# Altium PCB evacc_v3_1.PcbDoc (part 3 of 5)
Units mm, origin at the board's own origin, x right, y up, seen from the top; angles counter-clockwise.
Board outline 160 x 215 mm, 2 copper layers (Top Layer, Bottom Layer), stack 1.671 mm thick; 227 components, 143 nets, 622 pads, 320 vias.
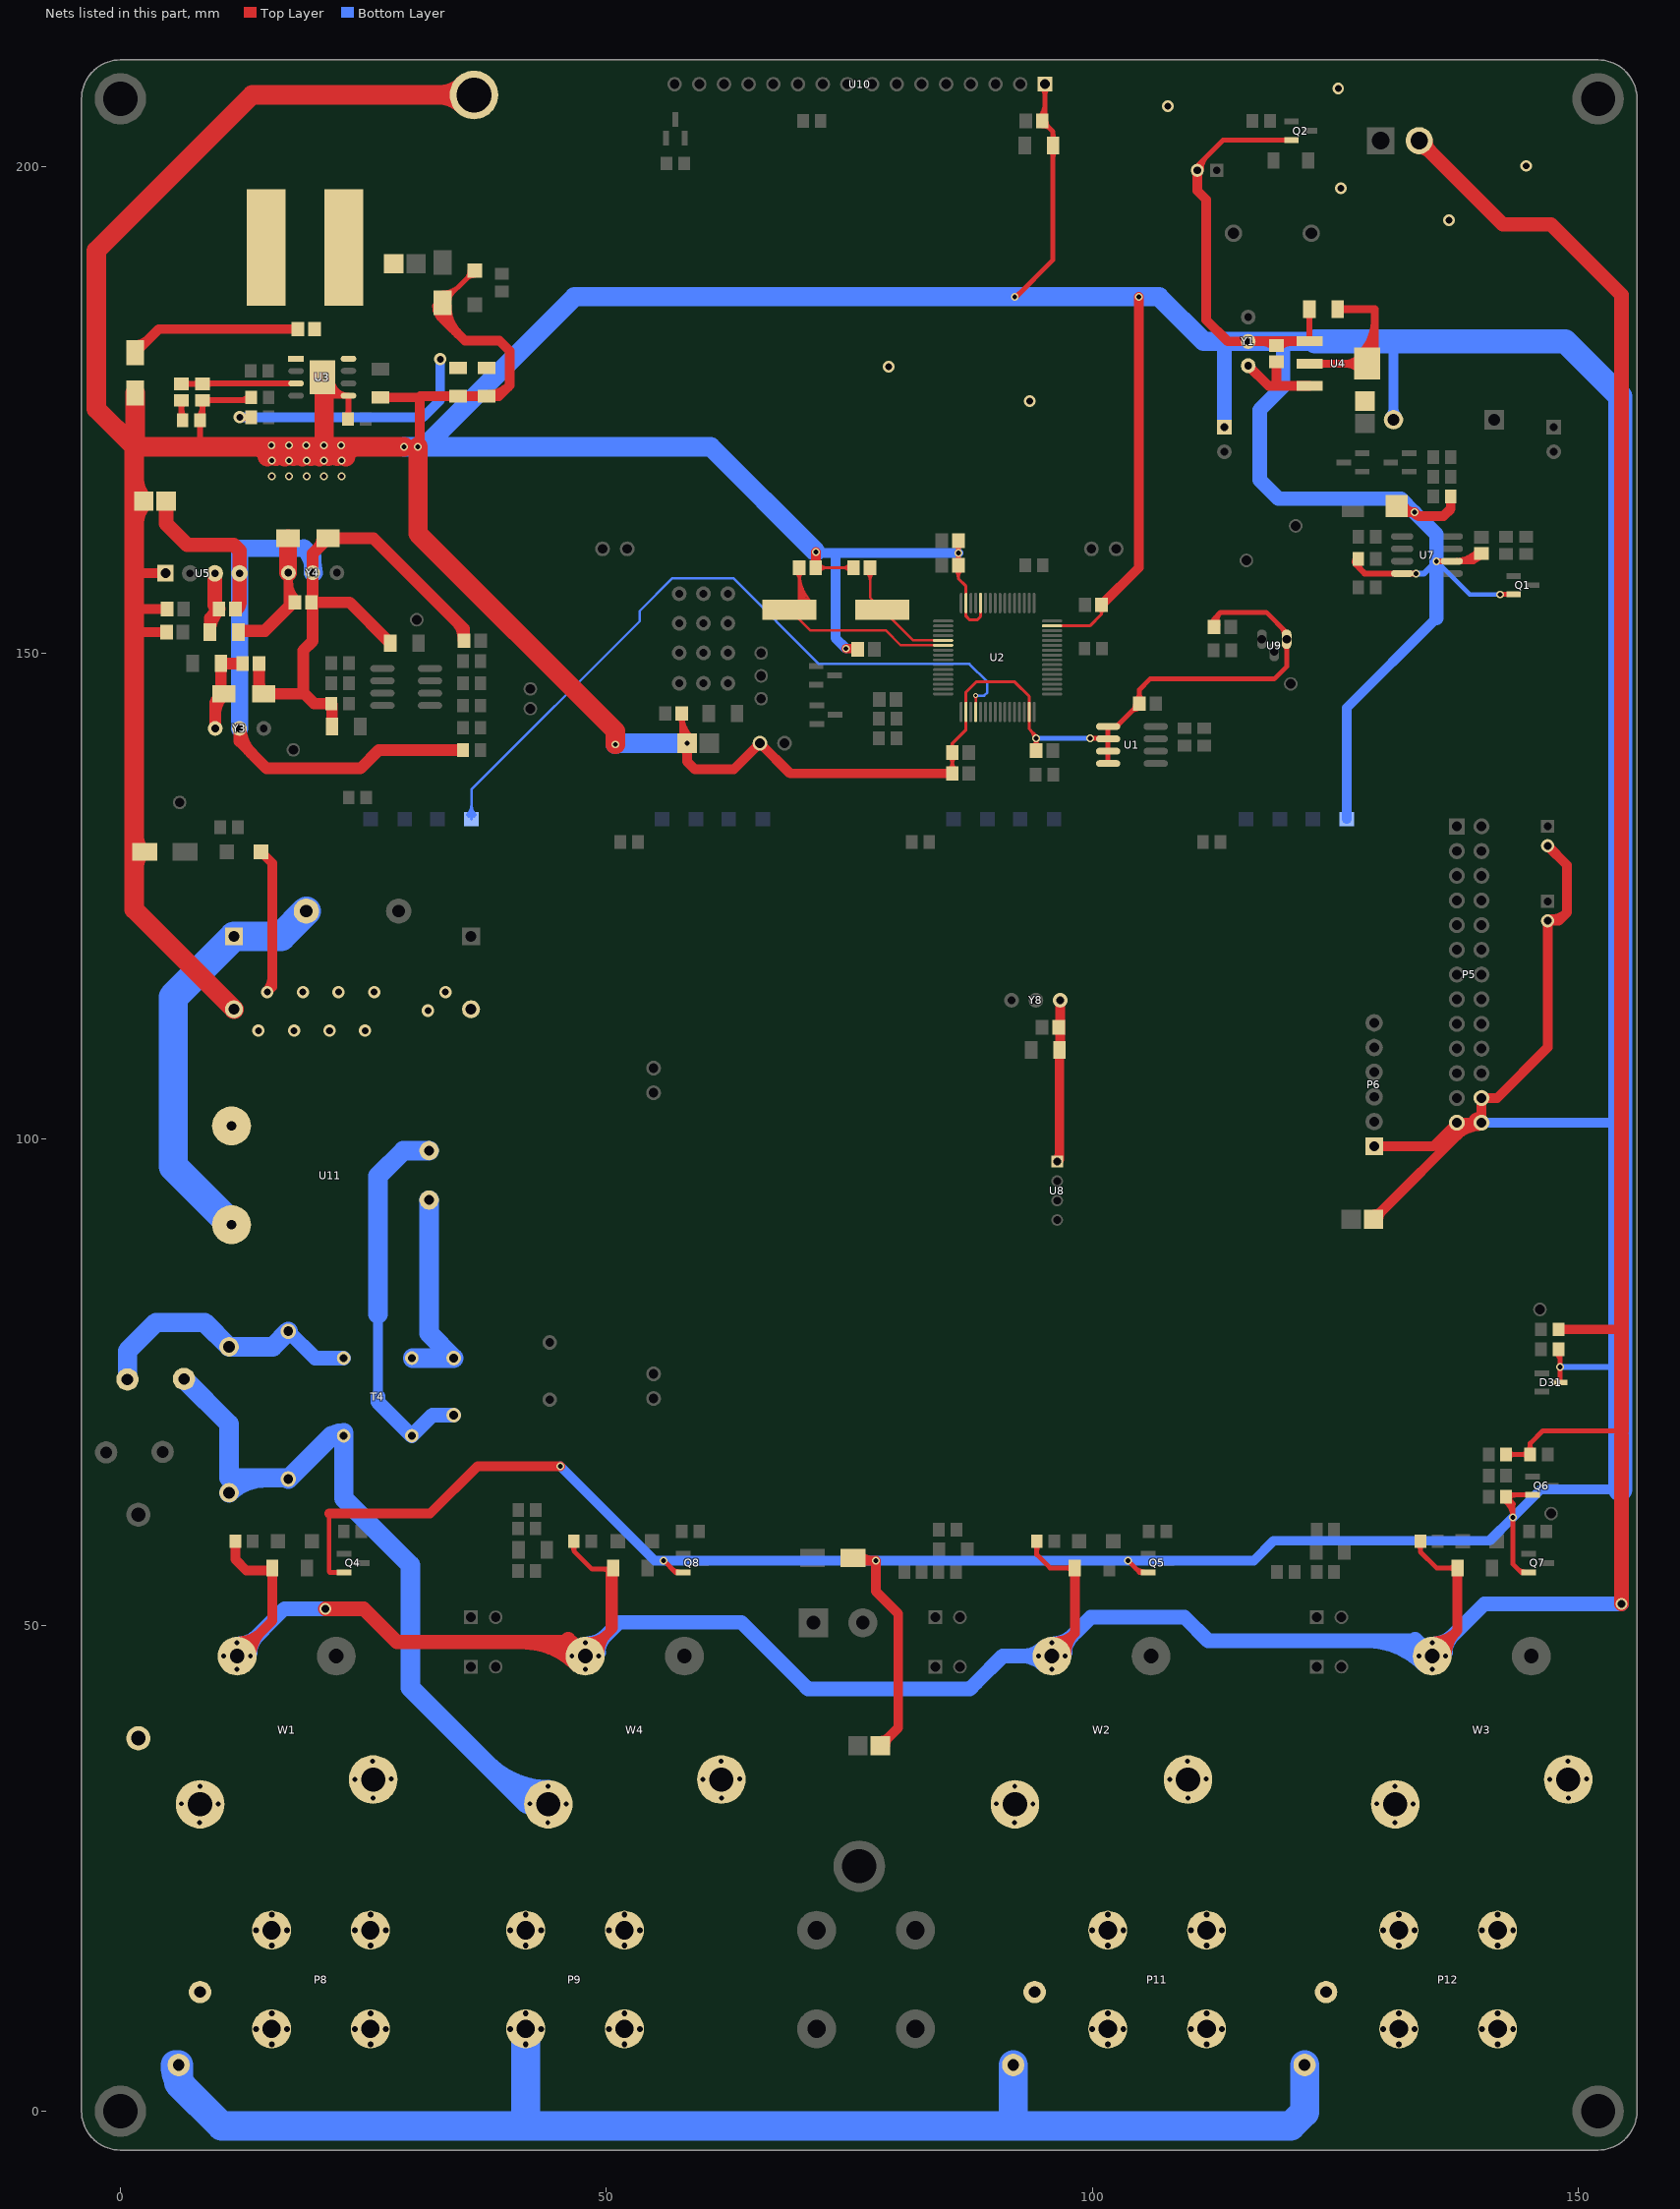
[diagram p3: the nets of this part, all layers, seen from the top]

## Via types
v1: diameter 0.8, hole 0.5, Top Layer to Bottom Layer, 150 vias
v2: diameter 0.8, hole 0.6, Top Layer to Bottom Layer, 80 vias
v3: diameter 0.5, hole 0.3, Top Layer to Bottom Layer, 53 vias
v4: diameter 1.27, hole 0.711, Top Layer to Bottom Layer, 20 vias
v5: diameter 1.2, hole 0.7, Top Layer to Bottom Layer, 13 vias
v6: diameter 1.2, hole 0.8, Top Layer to Bottom Layer, 4 vias

## Nets (pads, with @x,y where several pads share a name; then routed paths per layer and width w, separated by ;. In a path a pad name is that pad's centre, name@x,y a point inside that pad or via, vN(x,y) a via of type N, cw(c..) or ccw(c..) an arc to the next point about the centre after c; other vN are vias at no path point) (continued)
EM12V: D23.2 D24.2 D27.2 D28.2 P7.2 R47.2 R48.2 R49.2 R53.1 R54.2 R57.2 R58.2 W1.1 W2.1 W3.1 W4.1 | length 931.3
  Top Layer w0.254: v1(10.627,46.814) W1.1@12.002,46.814 v1(12.002,45.439) ; R47.2@11.819,58.371 R47.2@11.819,58.625 ; D23.2@15.624,55.626 D23.2@15.624,55.88 ; v1(47.816,45.439) W4.1@47.816,46.814 v1(47.816,48.189) ; 50.041,49.039 50.041,55.753 ; D28.2@50.676,55.753 D28.2@50.676,55.88 ; v1(95.822,45.439) W2.1@95.822,46.814 v1(95.822,48.189) ; v1(134.938,45.439) W3.1@134.938,46.814 v1(134.938,48.189) ; 154.394,69.977 154.394,80.442 154.394,162.14 ; 154.432,69.487 154.922,69.977 ; W1.1@11.286,46.814 cw(c11.286,47.473) 10.82,47.007 ccw(c11.286,47.473) W1.1@11.286,46.814 ; W1.1@11.286,46.814 ccw(c11.286,46.155) 10.82,46.621 cw(c11.286,46.155) W1.1@11.286,46.814 ; W1.1@12.002,46.098 cw(c11.343,46.098) 11.809,45.632 ccw(c11.343,46.098) W1.1@12.002,46.098 ; W1.1@12.002,46.098 ccw(c12.661,46.098) 12.195,45.632 cw(c12.661,46.098) W1.1@12.002,46.098 ; W4.1@47.816,46.098 cw(c47.157,46.098) 47.623,45.632 ccw(c47.157,46.098) W4.1@47.816,46.098 ; W4.1@47.816,46.098 ccw(c48.475,46.098) 48.009,45.632 cw(c48.475,46.098) W4.1@47.816,46.098 ; W4.1@47.816,47.529 cw(c48.475,47.529) 48.009,47.996 ccw(c48.475,47.529) W4.1@47.816,47.529 ; W4.1@47.816,47.529 ccw(c47.157,47.529) 47.623,47.996 cw(c47.157,47.529) W4.1@47.816,47.529 ; W2.1@95.822,46.098 cw(c95.163,46.098) 95.629,45.632 ccw(c95.163,46.098) W2.1@95.822,46.098 ; W2.1@95.822,46.098 ccw(c96.481,46.098) 96.015,45.632 cw(c96.481,46.098) W2.1@95.822,46.098 ; W2.1@95.822,47.529 cw(c96.481,47.529) 96.015,47.996 ccw(c96.481,47.529) W2.1@95.822,47.529 ; W2.1@95.822,47.529 ccw(c95.163,47.529) 95.629,47.996 cw(c95.163,47.529) W2.1@95.822,47.529 ; W3.1@134.938,46.098 cw(c134.279,46.098) 134.745,45.632 ccw(c134.279,46.098) W3.1@134.938,46.098 ; W3.1@134.938,46.098 ccw(c135.597,46.098) 135.131,45.632 cw(c135.597,46.098) W3.1@134.938,46.098 ; W3.1@134.938,47.529 cw(c135.597,47.529) 135.131,47.996 ccw(c135.597,47.529) W3.1@134.938,47.529 ; W3.1@134.938,47.529 ccw(c134.279,47.529) 134.745,47.996 cw(c134.279,47.529) W3.1@134.938,47.529 ; 50.041,52.92 cw(c53.411,52.92) 51.028,55.303 ccw(c53.411,52.92) 50.041,52.92 ; 50.041,53.533 cw(c52.798,53.533) 50.849,55.482 ccw(c52.798,53.533) 50.041,53.533 ; 50.041,54.146 cw(c52.185,54.146) 50.669,55.662 ccw(c52.185,54.146) 50.041,54.146 ; 50.041,54.759 cw(c51.572,54.759) 50.489,55.842 ccw(c51.572,54.759) 50.041,54.759 ; 50.041,55.373 cw(c50.958,55.373) 50.31,56.021 ccw(c50.958,55.373) 50.041,55.373
  Top Layer w0.5: R58.2@46.642,58.625 46.642,57.625 48.514,55.753 50.041,55.753 ; R49.2@94.267,58.625 94.267,57.244 95.631,55.88 D24.2@98.174,55.88 ; R57.2@133.72,58.625 133.72,57.542 135.382,55.88 D27.2@137.544,55.88 ; R54.2@142.549,67.564 R53.1@145.023,67.564 145.023,68.696 146.304,69.977 154.394,69.977 154.432,69.977 154.922,69.977 ; 46.642,57.68 cw(c47.487,57.68) 46.89,58.277 ccw(c47.487,57.68) 46.642,57.68 ; 46.642,57.68 ccw(c45.797,57.68) 46.395,58.277 cw(c45.797,57.68) 46.642,57.68 ; 50.041,55.753 cw(c50.041,55.465) 50.317,55.548 ccw(c50.041,55.465) 50.041,55.753 ; 50.041,55.753 ccw(c50.041,56.244) 50.401,55.91 cw(c50.041,56.244) 50.041,55.753 ; 94.267,57.68 cw(c95.112,57.68) 94.515,58.277 ccw(c95.112,57.68) 94.267,57.68 ; 94.267,57.68 ccw(c93.422,57.68) 94.02,58.277 cw(c93.422,57.68) 94.267,57.68 ; 97.269,55.88 cw(c97.269,54.975) 97.909,55.615 ccw(c97.269,54.975) 97.269,55.88 ; 97.269,55.88 ccw(c97.269,56.785) 97.909,56.145 cw(c97.269,56.785) 97.269,55.88 ; 133.72,57.68 cw(c134.565,57.68) 133.967,58.277 ccw(c134.565,57.68) 133.72,57.68 ; 133.72,57.68 ccw(c132.875,57.68) 133.472,58.277 cw(c132.875,57.68) 133.72,57.68 ; 136.639,55.88 cw(c136.639,54.975) 137.279,55.615 ccw(c136.639,54.975) 136.639,55.88 ; 136.639,55.88 ccw(c136.639,56.785) 137.279,56.145 cw(c136.639,56.785) 136.639,55.88 ; 143.394,67.564 cw(c143.394,68.409) 142.797,67.811 ccw(c143.394,68.409) 143.394,67.564 ; 143.394,67.564 ccw(c143.394,66.719) 142.797,67.317 cw(c143.394,66.719) 143.394,67.564 ; 144.178,67.564 cw(c144.178,66.719) 144.776,67.317 ccw(c144.178,66.719) 144.178,67.564 ; 144.178,67.564 ccw(c144.178,68.409) 144.776,67.811 cw(c144.178,68.409) 144.178,67.564 ; 145.023,68.509 cw(c144.178,68.509) 144.776,67.911 ccw(c144.178,68.509) 145.023,68.509 ; 145.023,68.509 ccw(c145.868,68.509) 145.271,67.911 cw(c145.868,68.509) 145.023,68.509 ; 49.534,55.753 cw(c49.534,54.513) 50.411,55.39 ccw(c49.534,54.513) 49.534,55.753 ; 50.007,55.753 ccw(c50.007,56.324) 50.411,55.92 cw(c50.007,56.324) 50.007,55.753
  Top Layer w1: R47.2@11.819,58.371 11.819,56.761 12.954,55.626 15.624,55.626 15.624,50.436 W1.1@12.002,46.814 v1(12.002,48.189) ; W4.1@47.816,46.814 50.041,49.039 ; D28.2@50.676,55.753 50.676,49.674 50.041,49.039 ; W2.1@95.822,46.814 98.174,49.166 ; D24.2@98.174,55.88 98.174,49.166 ; W3.1@134.938,46.814 137.544,49.42 D27.2@137.544,55.88 ; R48.2@147.941,80.416 154.369,80.416 ; 14.563,49.375 cw(c12.002,51.935) 12.002,48.314 ccw(c12.002,51.935) 14.563,49.375 ; 14.563,49.375 ccw(c17.123,46.814) 13.502,46.814 cw(c17.123,46.814) 14.563,49.375 ; 50.041,49.039 cw(c48.238,50.842) 47.972,48.306 ccw(c48.238,50.842) 50.041,49.039 ; 50.041,49.039 ccw(c51.844,47.236) 49.308,46.97 cw(c51.844,47.236) 50.041,49.039 ; 98.174,49.166 cw(c96.097,51.243) 95.915,48.311 ccw(c96.097,51.243) 98.174,49.166 ; 98.174,49.166 ccw(c100.251,47.089) 97.319,46.907 cw(c100.251,47.089) 98.174,49.166 ; 137.499,49.375 cw(c134.938,51.935) 134.938,48.314 ccw(c134.938,51.935) 137.499,49.375 ; 137.499,49.375 ccw(c140.059,46.814) 136.438,46.814 cw(c140.059,46.814) 137.499,49.375
  Top Layer w1.5: v6(21.082,51.689) 25.019,51.689 28.448,48.26 46.37,48.26 W4.1@47.129,47.501 ; P7.2@133.604,202.692 142.215,194.081 147.168,194.081 154.432,186.817 154.432,69.977 ; 154.369,80.416 154.394,80.442 ; v6(154.432,52.197) 154.432,69.487 ; W4.1@46.165,47.028 cw(c47.129,46.282) W4.1@47.129,47.501 ; W4.1@46.165,47.028 cw(c47.129,46.282) W4.1@47.129,47.501 ; W4.1@46.165,47.028 cw(c47.129,46.282) W4.1@47.129,47.501 ; W4.1@46.165,47.028 cw(c47.129,46.282) W4.1@47.129,47.501 ; W4.1@46.165,47.028 cw(c47.129,46.282) W4.1@47.129,47.501 ; W4.1@46.165,47.028 cw(c47.129,46.282) W4.1@47.129,47.501 ; W4.1@46.165,47.028 cw(c47.129,46.282) W4.1@47.129,47.501 ; W4.1@46.165,47.028 cw(c47.129,46.282) W4.1@47.129,47.501 ; W4.1@47.129,47.501 ccw(c47.129,48.72) W4.1@48.093,47.974 ; W4.1@47.129,47.501 ccw(c47.129,48.72) W4.1@48.093,47.974 ; W4.1@47.129,47.501 ccw(c47.129,48.72) W4.1@48.093,47.974 ; W4.1@47.129,47.501 ccw(c47.129,48.72) W4.1@48.093,47.974 ; W4.1@47.129,47.501 ccw(c47.129,48.72) W4.1@48.093,47.974 ; W4.1@47.129,47.501 ccw(c47.129,48.72) W4.1@48.093,47.974 ; W4.1@47.129,47.501 ccw(c47.129,48.72) W4.1@48.093,47.974 ; W4.1@47.129,47.501 ccw(c47.129,48.72) W4.1@48.093,47.974 ; W4.1@47.129,47.501 W4.1@47.816,46.814 ; W4.1@47.816,46.814 ccw(c46.812,45.809) 46.32,47.142 cw(c46.812,45.809) W4.1@47.816,46.814 ; 134.714,201.582 cw(c135.823,202.692) 134.254,202.692 ccw(c135.823,202.692) 134.714,201.582 ; 134.714,201.582 ccw(c133.604,200.473) 133.604,202.042 cw(c133.604,200.473) 134.714,201.582 ; 41.307,48.26 cw(c41.307,40.305) 46.932,45.93 ccw(c41.307,40.305) 41.307,48.26 ; 44.929,48.26 cw(c44.929,43.927) 47.993,46.991 ccw(c44.929,43.927) 44.929,48.26 ; 46.067,48.563 cw(c44.318,46.814) 46.791,46.814 ccw(c44.318,46.814) 46.067,48.563 ; W4.1@46.441,47.164 cw(c46.441,44.69) 48.191,46.439 ccw(c46.441,44.69) W4.1@46.441,47.164 ; W4.1@46.441,48.189 ccw(c47.446,49.193) 47.937,47.86 cw(c47.446,49.193) W4.1@46.441,48.189
  Bottom Layer w0.254: W1.1@12.002,46.814 v1(13.377,46.814) ; v1(46.441,46.814) W4.1@47.816,46.814 v1(49.191,46.814) ; 70.102,44.071 88.013,44.071 ; W2.1@95.822,46.814 v1(97.197,46.814) ; W3.1@133.133,47.244 133.82,47.932 W3.1@134.508,48.619 ; v1(133.563,46.814) W3.1@134.938,46.814 v1(136.313,46.814) ; W1.1@12.718,46.814 cw(c12.718,46.155) 13.184,46.621 ccw(c12.718,46.155) W1.1@12.718,46.814 ; W1.1@12.718,46.814 ccw(c12.718,47.473) 13.184,47.007 cw(c12.718,47.473) W1.1@12.718,46.814 ; W4.1@47.1,46.814 cw(c47.1,47.473) 46.634,47.007 ccw(c47.1,47.473) W4.1@47.1,46.814 ; W4.1@47.1,46.814 ccw(c47.1,46.155) 46.634,46.621 cw(c47.1,46.155) W4.1@47.1,46.814 ; W4.1@48.532,46.814 cw(c48.532,46.155) 48.998,46.621 ccw(c48.532,46.155) W4.1@48.532,46.814 ; W4.1@48.532,46.814 ccw(c48.532,47.473) 48.998,47.007 cw(c48.532,47.473) W4.1@48.532,46.814 ; W2.1@96.538,46.814 cw(c96.538,46.155) 97.004,46.621 ccw(c96.538,46.155) W2.1@96.538,46.814 ; W2.1@96.538,46.814 ccw(c96.538,47.473) 97.004,47.007 cw(c96.538,47.473) W2.1@96.538,46.814 ; W3.1@134.222,46.814 cw(c134.222,47.473) 133.756,47.007 ccw(c134.222,47.473) W3.1@134.222,46.814 ; W3.1@134.222,46.814 ccw(c134.222,46.155) 133.756,46.621 cw(c134.222,46.155) W3.1@134.222,46.814 ; W3.1@135.654,46.814 cw(c135.654,46.155) 136.12,46.621 ccw(c135.654,46.155) W3.1@135.654,46.814 ; W3.1@135.654,46.814 ccw(c135.654,47.473) 136.12,47.007 cw(c135.654,47.473) W3.1@135.654,46.814
  Bottom Layer w1.5: W1.1@12.002,46.814 12.689,47.501 16.877,51.689 v6(21.082,51.689) ; W4.1@47.816,46.814 48.503,47.501 51.294,50.292 63.881,50.292 70.102,44.071 70.739,43.434 87.376,43.434 88.013,44.071 90.756,46.814 v1(94.447,46.814) W2.1@95.822,46.814 96.509,47.501 99.808,50.8 109.474,50.8 111.887,48.387 133.365,48.387 133.82,47.932 W3.1@134.251,47.501 ; v6(154.432,52.197) 140.321,52.197 135.625,47.501 W3.1@134.938,46.814 ; W1.1@11.881,47.86 ccw(c12.372,49.193) W1.1@13.377,48.189 ; W1.1@11.881,47.86 ccw(c12.372,49.193) W1.1@13.377,48.189 ; W1.1@11.881,47.86 ccw(c12.372,49.193) W1.1@13.377,48.189 ; W1.1@11.881,47.86 ccw(c12.372,49.193) W1.1@13.377,48.189 ; W1.1@13.048,46.693 cw(c14.381,47.184) W1.1@13.377,48.189 ; W1.1@13.048,46.693 cw(c14.381,47.184) W1.1@13.377,48.189 ; W1.1@13.048,46.693 cw(c14.381,47.184) W1.1@13.377,48.189 ; W1.1@13.048,46.693 cw(c14.381,47.184) W1.1@13.377,48.189 ; 13.751,48.563 ccw(c15.5,46.814) 13.027,46.814 cw(c15.5,46.814) 13.751,48.563 ; 13.751,48.563 cw(c12.002,50.312) 12.002,47.839 ccw(c12.002,50.312) 13.751,48.563 ; 14.136,48.948 cw(c12.002,51.082) 12.002,48.064 ccw(c12.002,51.082) 14.136,48.948 ; 14.136,48.948 ccw(c16.27,46.814) 13.252,46.814 cw(c16.27,46.814) 14.136,48.948 ; W4.1@47.695,47.86 ccw(c48.186,49.193) W4.1@49.191,48.189 ; W4.1@47.695,47.86 ccw(c48.186,49.193) W4.1@49.191,48.189 ; W4.1@47.695,47.86 ccw(c48.186,49.193) W4.1@49.191,48.189 ; W4.1@47.695,47.86 ccw(c48.186,49.193) W4.1@49.191,48.189 ; W4.1@48.862,46.693 cw(c50.195,47.184) W4.1@49.191,48.189 ; W4.1@48.862,46.693 cw(c50.195,47.184) W4.1@49.191,48.189 ; W4.1@48.862,46.693 cw(c50.195,47.184) W4.1@49.191,48.189 ; W4.1@48.862,46.693 cw(c50.195,47.184) W4.1@49.191,48.189 ; 49.565,48.563 cw(c47.816,50.312) 47.816,47.839 ccw(c47.816,50.312) 49.565,48.563 ; 49.565,48.563 ccw(c51.314,46.814) 48.841,46.814 cw(c51.314,46.814) 49.565,48.563 ; 49.95,48.948 cw(c47.816,51.082) 47.816,48.064 ccw(c47.816,51.082) 49.95,48.948 ; 49.95,48.948 ccw(c52.084,46.814) 49.066,46.814 cw(c52.084,46.814) 49.95,48.948 ; 92.804,46.814 cw(c92.804,43.796) 94.938,45.93 ccw(c92.804,43.796) 92.804,46.814 ; 92.804,46.814 ccw(c92.804,49.832) 94.938,47.698 cw(c92.804,49.832) 92.804,46.814 ; W2.1@95.701,47.86 ccw(c96.192,49.193) W2.1@97.197,48.189 ; W2.1@95.701,47.86 ccw(c96.192,49.193) W2.1@97.197,48.189 ; W2.1@95.701,47.86 ccw(c96.192,49.193) W2.1@97.197,48.189 ; W2.1@95.701,47.86 ccw(c96.192,49.193) W2.1@97.197,48.189 ; W2.1@96.868,46.693 cw(c98.201,47.184) W2.1@97.197,48.189 ; W2.1@96.868,46.693 cw(c98.201,47.184) W2.1@97.197,48.189 ; W2.1@96.868,46.693 cw(c98.201,47.184) W2.1@97.197,48.189 ; W2.1@96.868,46.693 cw(c98.201,47.184) W2.1@97.197,48.189 ; 97.571,48.563 cw(c95.822,50.312) 95.822,47.839 ccw(c95.822,50.312) 97.571,48.563 ; 97.571,48.563 ccw(c99.32,46.814) 96.847,46.814 cw(c99.32,46.814) 97.571,48.563 ; 97.956,48.948 cw(c95.822,51.082) 95.822,48.064 ccw(c95.822,51.082) 97.956,48.948 ; 97.956,48.948 ccw(c100.09,46.814) 97.072,46.814 cw(c100.09,46.814) 97.956,48.948 ; W3.1@133.287,47.028 cw(c134.251,46.282) W3.1@134.251,47.501 ; W3.1@133.287,47.028 cw(c134.251,46.282) W3.1@134.251,47.501 ; W3.1@133.287,47.028 cw(c134.251,46.282) W3.1@134.251,47.501 ; W3.1@133.287,47.028 cw(c134.251,46.282) W3.1@134.251,47.501 ; W3.1@133.287,47.028 cw(c134.251,46.282) W3.1@134.251,47.501 ; W3.1@133.287,47.028 cw(c134.251,46.282) W3.1@134.251,47.501 ; W3.1@133.287,47.028 cw(c134.251,46.282) W3.1@134.251,47.501 ; W3.1@133.287,47.028 cw(c134.251,46.282) W3.1@134.251,47.501 ; W3.1@133.442,47.142 cw(c133.934,45.809) W3.1@134.938,46.814 ; W3.1@133.442,47.142 cw(c133.934,45.81) W3.1@134.938,46.814 ; W3.1@133.442,47.142 cw(c133.934,45.81) W3.1@134.938,46.814 ; W3.1@133.442,47.142 cw(c133.934,45.81) W3.1@134.938,46.814 ; W3.1@133.442,47.142 cw(c133.934,45.809) W3.1@134.938,46.814 ; W3.1@133.442,47.142 cw(c133.934,45.81) W3.1@134.938,46.814 ; W3.1@133.442,47.142 cw(c133.934,45.81) W3.1@134.938,46.814 ; W3.1@133.442,47.142 cw(c133.934,45.81) W3.1@134.938,46.814 ; W3.1@133.564,48.189 ccw(c134.568,49.193) W3.1@135.059,47.86 ; W3.1@133.564,48.188 ccw(c134.568,49.193) W3.1@135.059,47.86 ; W3.1@133.563,48.189 ccw(c134.568,49.193) W3.1@135.059,47.86 ; W3.1@133.563,48.188 ccw(c134.568,49.193) W3.1@135.059,47.86 ; W3.1@133.564,48.189 ccw(c134.568,49.193) W3.1@135.059,47.86 ; W3.1@133.564,48.188 ccw(c134.568,49.193) W3.1@135.059,47.86 ; W3.1@133.563,48.189 ccw(c134.568,49.193) W3.1@135.059,47.86 ; W3.1@133.563,48.188 ccw(c134.568,49.193) W3.1@135.059,47.86 ; W3.1@134.251,47.501 ccw(c134.251,48.72) W3.1@135.215,47.974 ; W3.1@134.251,47.501 ccw(c134.251,48.72) W3.1@135.215,47.974 ; W3.1@134.251,47.501 ccw(c134.251,48.72) W3.1@135.215,47.974 ; W3.1@134.251,47.501 ccw(c134.251,48.72) W3.1@135.215,47.974 ; W3.1@134.251,47.501 ccw(c134.251,48.72) W3.1@135.215,47.974 ; W3.1@134.251,47.501 ccw(c134.251,48.72) W3.1@135.215,47.974 ; W3.1@134.251,47.501 ccw(c134.251,48.72) W3.1@135.215,47.974 ; W3.1@134.251,47.501 ccw(c134.251,48.72) W3.1@135.215,47.974 ; W3.1@134.251,47.501 W3.1@134.938,46.814 ; W3.1@134.817,47.86 ccw(c135.308,49.193) W3.1@136.313,48.189 ; W3.1@134.817,47.86 ccw(c135.308,49.193) W3.1@136.313,48.189 ; W3.1@134.817,47.86 ccw(c135.308,49.193) W3.1@136.313,48.189 ; W3.1@134.817,47.86 ccw(c135.308,49.193) W3.1@136.313,48.189 ; W3.1@135.984,46.693 cw(c137.317,47.184) W3.1@136.313,48.189 ; W3.1@135.984,46.693 cw(c137.317,47.184) W3.1@136.313,48.189 ; W3.1@135.984,46.693 cw(c137.317,47.184) W3.1@136.313,48.189 ; W3.1@135.984,46.693 cw(c137.317,47.184) W3.1@136.313,48.189 ; 136.687,48.563 ccw(c138.436,46.814) 135.963,46.814 cw(c138.436,46.814) 136.687,48.563 ; 136.687,48.563 cw(c134.938,50.312) 134.938,47.839 ccw(c134.938,50.312) 136.687,48.563 ; 137.072,48.948 cw(c134.938,51.082) 134.938,48.064 ccw(c134.938,51.082) 137.072,48.948 ; 137.072,48.948 ccw(c139.206,46.814) 136.188,46.814 cw(c139.206,46.814) 137.072,48.948 ; W1.1@11.628,46.439 cw(c13.377,44.69) 13.377,47.164 ccw(c13.377,44.69) W1.1@11.628,46.439 ; W4.1@47.442,46.439 cw(c49.191,44.69) 49.191,47.164 ccw(c49.191,44.69) W4.1@47.442,46.439 ; W2.1@95.448,46.439 cw(c97.197,44.69) 97.197,47.164 ccw(c97.197,44.69) W2.1@95.448,46.439 ; 128.123,48.387 cw(c128.123,39.999) 134.054,45.93 ccw(c128.123,39.999) 128.123,48.387 ; 131.744,48.387 cw(c131.744,43.62) 135.115,46.991 ccw(c131.744,43.62) 131.744,48.387 ; 133.189,48.563 cw(c131.44,46.814) 133.913,46.814 ccw(c131.44,46.814) 133.189,48.563 ; W3.1@133.563,47.164 cw(c133.563,44.69) 135.313,46.439 ccw(c133.563,44.69) W3.1@133.563,47.164 ; W3.1@134.564,46.439 cw(c136.313,44.69) 136.313,47.164 ccw(c136.313,44.69) W3.1@134.564,46.439
FAULT: D20.2 U2.20 | length 83.6
  Top Layer w0.254: U2.20@87.984,143.932 v3(87.984,145.602) ; 87.984,145.305 cw(c88.281,145.305) 88.071,145.515 ccw(c88.281,145.305) 87.984,145.305 ; 87.984,145.305 ccw(c87.687,145.305) 87.897,145.515 cw(c87.687,145.305) 87.984,145.305
  Bottom Layer w0.254: D20.2@36.104,132.906 36.104,135.951 53.416,153.264 53.416,154.305 56.794,157.683 63.043,157.683 71.857,148.869 87.325,148.869 89.179,147.015 89.179,145.923 88.858,145.602 v3(87.984,145.602) ; 36.104,133.797 cw(c35.213,133.797) 35.843,133.167 ccw(c35.213,133.797) 36.104,133.797 ; 36.104,133.797 ccw(c36.995,133.797) 36.365,133.167 cw(c36.995,133.797) 36.104,133.797 ; 36.104,134.41 cw(c34.6,134.41) 35.663,133.346 ccw(c34.6,134.41) 36.104,134.41 ; 36.104,134.41 ccw(c37.608,134.41) 36.545,133.346 cw(c37.608,134.41) 36.104,134.41 ; 88.281,145.602 cw(c88.281,145.899) 88.071,145.689 ccw(c88.281,145.899) 88.281,145.602 ; 88.281,145.602 ccw(c88.281,145.305) 88.071,145.515 cw(c88.281,145.305) 88.281,145.602
GND: C1.2 C2.2 C3.2 C4.2 C5.2 C6.2 C7.2 C9.2 C10.1 C11.1 C15.2 C16.2 C17.2 C18.2 C19.2 C20.2 C21.2 C24.2 C33.1 C37.1 C38.2 C39.2 C40.2 C41.2 C42.2 C43.2 C44.1 C46.2 D3.1 D4.1 D5.1 D6.2 D8.2 D10.1 D12.1 D14.2 D22.1 D31.3 D32.1 J1.2 J4.1 J9.1 J10.2 J11.2 P5.24 P5.25 P5.26 P6.1 pad.0 Q1.2 Q2.2 Q4.2 Q5.2 Q6.2 Q7.2 Q8.2 R11.1 R12.2 R13.1 R38.1 R50.2 R56.2 R62.1 U1.1 U1.2 U1.3 U1.4 U2.18 U2.31 U2.47 U2.60 U2.63 U3.0 U3.5 U4.1 U5.1 U7.4 U7.6 U9.1 U10.1 U11.4 Y1.2 | length 1566.7
  Top Layer w0.254: J4.1@57.885,139.941 cw(c57.29,138.789) 58.586,138.789 ; J4.1@58.002,140.166 cw(c57.505,139.207) 58.586,139.207 ; J4.1@58.1,140.523 cw(c56.928,139.351) 58.586,139.351 ; J4.1@58.118,140.392 cw(c57.721,139.624) 58.586,139.624 ; J4.1@58.28,140.703 cw(c57.541,139.964) J4.1@58.586,139.964 ; 58.586,139.332 cw(c59.67,139.332) J4.1@58.903,140.099 ; J4.1@58.586,140.716 58.586,138.813 59.375,138.024
  Top Layer w0.3: C10.1@71.526,158.763 C11.1@75.414,158.763 ; C7.2@85.574,137.224 C7.2@85.574,137.605 C6.2@85.574,139.764 85.574,140.692 ; C5.2@86.194,161.544 v1(86.194,160.299) ; U2.60@88.484,155.132 88.484,153.737 88.138,153.391 87.376,153.391 86.984,153.783 U2.63@86.984,155.132 86.984,156.856 86.194,157.646 C4.2@86.194,159.004 v1(86.194,160.299) ; C2.2@94.21,139.764 C2.2@94.21,139.967 v1(94.21,141.199) ; U2.47@95.834,152.782 99.721,152.782 100.926,153.987 ; C3.2@100.926,154.94 100.926,153.987 ; 72.733,158.763 cw(c72.733,159.97) 71.88,159.117 ccw(c72.733,159.97) 72.733,158.763 ; 72.733,158.763 ccw(c72.733,157.556) 71.88,158.41 cw(c72.733,157.556) 72.733,158.763 ; 74.207,158.763 cw(c74.207,157.556) 75.06,158.41 ccw(c74.207,157.556) 74.207,158.763 ; 74.207,158.763 ccw(c74.207,159.97) 75.06,159.117 cw(c74.207,159.97) 74.207,158.763 ; 85.574,138.457 cw(c86.781,138.457) 85.928,139.31 ccw(c86.781,138.457) 85.574,138.457 ; 85.574,138.457 ccw(c84.367,138.457) 85.22,139.31 cw(c84.367,138.457) 85.574,138.457 ; 85.574,138.912 cw(c84.367,138.912) 85.22,138.059 ccw(c84.367,138.912) 85.574,138.912 ; 85.574,138.912 ccw(c86.781,138.912) 85.928,138.059 cw(c86.781,138.912) 85.574,138.912 ; 85.574,140.692 cw(c85.138,140.692) 85.341,140.306 ccw(c85.138,140.692) 85.574,140.692 ; 85.574,140.692 ccw(c86.01,140.692) 85.807,140.306 cw(c86.01,140.692) 85.574,140.692 ; 85.574,140.692 86.984,142.102 U2.18@86.984,143.932 86.984,145.963 88.036,147.015 91.999,147.015 93.484,145.53 93.484,143.932 93.484,142.177 94.21,141.451 v1(94.21,141.199) ; 86.194,157.697 cw(c87.401,157.697) 86.548,158.55 ccw(c87.401,157.697) 86.194,157.697 ; 86.194,157.697 ccw(c84.987,157.697) 85.84,158.55 cw(c84.987,157.697) 86.194,157.697 ; C4.2@86.194,159.696 cw(c86.798,159.696) 86.371,160.123 ccw(c86.798,159.696) C4.2@86.194,159.696 ; C4.2@86.194,159.696 ccw(c85.59,159.696) 86.017,160.123 cw(c85.59,159.696) C4.2@86.194,159.696 ; v1(86.194,160.299) cw(c87.254,160.299) 86.534,161.077 ccw(c87.254,160.299) v1(86.194,160.299) ; v1(86.194,160.299) ccw(c85.134,160.299) 85.854,161.077 cw(c85.134,160.299) v1(86.194,160.299) ; v1(86.194,160.299) cw(c85.015,160.299) 85.843,159.46 ccw(c85.015,160.299) v1(86.194,160.299) ; v1(86.194,160.299) ccw(c87.373,160.299) 86.545,159.46 cw(c87.373,160.299) v1(86.194,160.299) ; C5.2@86.194,160.903 cw(c85.59,160.903) 86.017,160.476 ccw(c85.59,160.903) C5.2@86.194,160.903 ; C5.2@86.194,160.903 ccw(c86.798,160.903) 86.371,160.476 cw(c86.798,160.903) C5.2@86.194,160.903 ; C2.2@94.21,140.595 cw(c94.814,140.595) 94.387,141.022 ccw(c94.814,140.595) C2.2@94.21,140.595 ; C2.2@94.21,140.595 ccw(c93.606,140.595) 94.033,141.022 cw(c93.606,140.595) C2.2@94.21,140.595 ; v1(94.21,141.199) cw(c93.18,141.199) 93.873,140.437 ccw(c93.18,141.199) v1(94.21,141.199) ; v1(94.21,141.199) ccw(c95.24,141.199) 94.547,140.437 cw(c95.24,141.199) v1(94.21,141.199) ; 100.926,153.987 cw(c101.404,153.987) 101.17,154.404 ccw(c101.404,153.987) 100.926,153.987 ; 100.926,153.987 ccw(c100.448,153.987) 100.682,154.404 cw(c100.448,153.987) 100.926,153.987 ; 93.605,142.057 cw(c92.747,141.199) 93.96,141.199 ccw(c92.747,141.199) 93.605,142.057
  Top Layer w0.5: 21.463,61.468 21.463,55.499 21.524,55.438 Q4.2@22.992,55.438 ; D4.1@33.147,186.012 33.147,186.027 D6.2@36.449,189.329 ; v1(55.88,56.642) 57.084,55.438 Q8.2@57.895,55.438 ; 57.746,142.583 ccw(c60.096,142.583) J4.1@58.46,140.895 ; C21.2@57.746,143.764 ccw(c61.242,143.764) J4.1@58.808,141.254 ; C21.2@57.746,143.764 57.746,141.256 J4.1@58.286,140.716 ; v1(91.999,186.614) 92.126,186.614 95.938,190.426 C40.2@95.938,202.184 95.938,203.616 C41.2@94.83,204.724 95.105,204.999 U10.1@95.105,208.503 ; v1(99.746,141.199) 101.562,141.199 U1.2@101.6,141.161 ; U1.4@101.6,138.621 U1.3@101.6,139.891 U1.2@101.6,141.161 ; v1(103.632,56.642) 104.836,55.438 Q5.2@105.73,55.438 ; C46.2@110.776,199.644 110.776,200.108 113.426,202.758 Q2.2@120.462,202.758 ; C37.1@112.51,152.679 112.51,153.531 ; v1@141.925,156.022 Q1.2@143.322,156.022 ; Q7.2@144.846,55.438 144.079,55.438 143.256,56.261 v1(143.256,61.087) 143.256,62.506 R56.2@142.549,63.213 142.726,63.39 Q6.2@145.271,63.39 ; D31.3@148.118,74.955 148.118,76.53 R50.2@148.118,78.207 ; 35.595,188.475 cw(c36.449,187.622) 36.449,188.829 ccw(c36.449,187.622) 35.595,188.475 ; 35.595,188.475 ccw(c34.742,189.329) 35.949,189.329 cw(c34.742,189.329) 35.595,188.475 ; 57.746,142.698 cw(c58.712,142.698) 58.029,143.381 ccw(c58.712,142.698) 57.746,142.698 ; 57.746,142.698 ccw(c56.78,142.698) 57.463,143.381 cw(c56.78,142.698) 57.746,142.698 ; 95.105,207.296 cw(c96.312,207.296) 95.459,208.15 ccw(c96.312,207.296) 95.105,207.296 ; 95.105,207.296 ccw(c93.898,207.296) 94.751,208.15 cw(c93.898,207.296) 95.105,207.296 ; 95.938,200.968 cw(c96.904,200.968) 96.221,201.651 ccw(c96.904,200.968) 95.938,200.968 ; 95.938,200.968 ccw(c94.972,200.968) 95.655,201.651 cw(c94.972,200.968) 95.938,200.968 ; 95.938,203.4 cw(c94.972,203.4) 95.655,202.717 ccw(c94.972,203.4) 95.938,203.4 ; 95.938,203.4 ccw(c96.904,203.4) 96.221,202.717 cw(c96.904,203.4) 95.938,203.4 ; U1.2@101.6,141.161 U1.1@101.6,142.431 102.465,142.431 C1.2@104.814,144.78 104.814,146.216 105.918,147.32 118.694,147.32 119.964,148.59 U9.1@119.964,151.409 119.964,152.095 117.881,154.178 113.157,154.178 ; 104.814,145.846 cw(c103.848,145.846) 104.531,145.163 ccw(c103.848,145.846) 104.814,145.846 ; 104.814,145.846 ccw(c105.78,145.846) 105.097,145.163 cw(c105.78,145.846) 104.814,145.846 ; 112.51,153.531 cw(c112.004,153.531) 112.287,153.111 ccw(c112.004,153.531) 112.51,153.531 ; 112.51,153.531 ccw(c113.017,153.531) 112.734,153.111 cw(c113.017,153.531) 112.51,153.531 ; 112.51,153.531 113.157,154.178 ; 113.157,154.178 ccw(c113.997,153.338) 112.885,152.92 cw(c113.997,153.338) 113.157,154.178 ; 119.964,150.306 cw(c120.568,150.306) 120.141,150.733 ccw(c120.568,150.306) 119.964,150.306 ; 119.964,150.306 ccw(c119.361,150.306) 119.787,150.733 cw(c119.361,150.306) 119.964,150.306 ; D4.1@33.147,186.537 ccw(c33.147,187.768) 34.018,186.898 cw(c33.147,187.768) D4.1@33.147,186.537 ; D4.1@33.147,187.037 ccw(c33.147,189.475) 34.871,187.751 cw(c33.147,189.475) D4.1@33.147,187.037 ; D4.1@33.822,186.362 cw(c34.643,186.362) 34.062,186.942 ccw(c34.643,186.362) D4.1@33.822,186.362 ; 56.743,55.779 ccw(c57.445,56.48) 57.445,55.488 cw(c57.445,56.48) 56.743,55.779 ; v1@91.999,186.764 ccw(c91.999,187.433) 92.472,186.96 cw(c91.999,187.433) v1@91.999,186.764 ; C41.2@94.547,205.107 ccw(c93.2,206.454) 95.105,206.454 cw(c93.2,206.454) C41.2@94.547,205.107 ; C41.2@94.83,204.224 cw(c94.83,203.017) 95.684,203.87 ccw(c94.83,203.017) C41.2@94.83,204.224 ; C41.2@95.23,204.624 ccw(c95.954,204.624) 95.442,204.112 cw(c95.954,204.624) C41.2@95.23,204.624 ; 103.96,143.926 cw(c104.814,143.073) 104.814,144.28 ccw(c104.814,143.073) 103.96,143.926 ; C1.2@104.202,144.168 ccw(c103.69,144.68) 104.414,144.68 cw(c103.69,144.68) C1.2@104.202,144.168 ; 104.437,55.837 ccw(c105.28,56.681) 105.28,55.488 cw(c105.28,56.681) 104.437,55.837 ; C46.2@110.701,199.644 cw(c111.64,199.644) 110.976,200.308 ccw(c111.64,199.644) C46.2@110.701,199.644 ; C46.2@111.201,199.644 cw(c113.347,199.644) 111.829,201.161 ccw(c113.347,199.644) C46.2@111.201,199.644 ; C37.1@112.417,152.744 cw(c113.199,153.038) 112.608,153.629 ccw(c113.199,153.038) C37.1@112.417,152.744 ; 119.406,152.653 cw(c118.662,151.909) 119.714,151.909 ccw(c118.662,151.909) 119.406,152.653 ; R56.2@142.336,62.836 cw(c140.899,60.967) 143.256,60.967 ccw(c140.899,60.967) R56.2@142.336,62.836 ; R56.2@142.553,62.763 cw(c142.565,61.715) 143.306,62.456 ccw(c142.565,61.715) R56.2@142.553,62.763 ; R56.2@142.641,63.232 cw(c141.68,61.983) 143.256,61.983 ccw(c141.68,61.983) R56.2@142.641,63.232 ; R56.2@142.797,63.066 cw(c143.579,62.283) 143.579,63.39 ccw(c143.579,62.283) R56.2@142.797,63.066 ; R56.2@142.797,63.561 ccw(c143.209,63.973) 143.209,63.39 cw(c143.209,63.973) R56.2@142.797,63.561 ; R56.2@142.899,63.113 ccw(c143.503,63.113) 143.076,62.687 cw(c143.503,63.113) R56.2@142.899,63.113 ; 143.769,55.748 ccw(c144.396,56.374) 144.396,55.488 cw(c144.396,56.374) 143.769,55.748 ; R50.2@147.693,78.037 cw(c146.668,77.012) 148.118,77.012 ccw(c146.668,77.012) R50.2@147.693,78.037
  Top Layer w0.6: 8.128,171.196 8.203,171.271 R13.1@8.203,173.916 8.446,174.159 C20.2@8.446,175.987 13.162,175.987 R12.2@13.451,176.276 ; U3.0@20.765,176.71 U3.0@20.765,177.842 ; U3.0@20.765,178.361 U3.0@20.765,177.842 ; R11.1@23.421,174.054 23.465,174.098 U3.5@23.465,176.456 ; C15.2@26.565,176.456 C15.2@26.734,176.287 ; C17.2@122.312,185.346 122.312,182.082 U4.1@122.336,182.058 ; R38.1@127.345,159.69 127.345,158.812 127.988,158.168 U7.4@131.855,158.168 v1(133.297,158.168) ; v1(135.38,159.438) U7.6@136.955,159.438 139.217,159.438 C33.1@139.993,160.214 ; 8.203,173.092 cw(c8.927,173.092) 8.415,173.604 ccw(c8.927,173.092) 8.203,173.092 ; 8.203,173.092 ccw(c7.479,173.092) 7.991,173.604 cw(c7.479,173.092) 8.203,173.092 ; 8.446,175.142 cw(c9.291,175.142) 8.693,175.74 ccw(c9.291,175.142) 8.446,175.142 ; 8.446,175.142 ccw(c7.601,175.142) 8.199,175.74 cw(c7.601,175.142) 8.446,175.142 ; 9.391,175.987 cw(c9.391,176.832) 8.793,176.235 ccw(c9.391,176.832) 9.391,175.987 ; 9.391,175.987 ccw(c9.391,175.142) 8.793,175.74 cw(c9.391,175.142) 9.391,175.987 ; U3.0@20.765,177.842 20.955,177.652 22.151,176.456 U3.5@23.465,176.456 ; 22.114,176.493 cw(c23.054,177.433) 21.753,177.708 ccw(c23.054,177.433) 22.114,176.493 ; 22.114,176.493 ccw(c21.071,175.45) 20.89,176.914 cw(c21.071,175.45) 22.114,176.493 ; U3.5@23.465,176.456 cw(c23.465,178.157) 21.771,178.006 ccw(c23.465,178.157) U3.5@23.465,176.456 ; 122.312,184.251 cw(c123.157,184.251) 122.56,184.849 ccw(c123.157,184.251) 122.312,184.251 ; 122.312,184.251 ccw(c121.467,184.251) 122.065,184.849 cw(c121.467,184.251) 122.312,184.251 ; R38.1@127.132,159.378 cw(c126.62,158.866) 127.345,158.866 ; R38.1@127.132,159.378 cw(c126.62,158.866) 127.345,158.866 ; R38.1@127.132,159.378 cw(c126.62,158.866) 127.345,158.866 ; R38.1@127.132,159.378 cw(c126.62,158.866) 127.345,158.866 ; 127.345,158.866 cw(c128.069,158.866) R38.1@127.557,159.378 ; 127.345,158.866 cw(c128.069,158.866) R38.1@127.557,159.378 ; 127.345,158.866 cw(c128.069,158.866) R38.1@127.557,159.378 ; 127.345,158.866 cw(c128.069,158.866) R38.1@127.557,159.378 ; R13.1@7.991,174.228 ccw(c6.892,175.327) 8.446,175.327 cw(c6.892,175.327) R13.1@7.991,174.228 ; 12.271,175.987 ccw(c12.271,177.356) 13.239,176.388 cw(c12.271,177.356) 12.271,175.987 ; U3.0@20.576,177.899 ccw(c22.153,178.04) 22.153,176.456 cw(c22.153,178.04) U3.0@20.576,177.899 ; U3.0@21.173,177.952 ccw(c22.809,178.098) 22.809,176.456 cw(c22.809,178.098) U3.0@21.173,177.952 ; R11.1@23.209,174.366 ccw(c22.591,174.984) 23.465,174.984 cw(c22.591,174.984) R11.1@23.209,174.366 ; 23.465,174.772 ccw(c24.039,174.772) 23.633,174.366 cw(c24.039,174.772) 23.465,174.772 ; 122.312,182.599 ccw(c122.877,182.599) 122.477,182.199 cw(c122.877,182.599) 122.312,182.599 ; R38.1@127.118,159.787 ccw(c127.547,159.413) 127.145,159.011 cw(c127.547,159.413) R38.1@127.118,159.787 ; R38.1@127.571,159.393 ccw(c128.032,158.99) 127.599,158.557 cw(c128.032,158.99) R38.1@127.571,159.393 ; U7.6@137.175,159.438 ccw(c137.175,162.931) 139.645,160.461 cw(c137.175,162.931) U7.6@137.175,159.438 ; 138.624,159.438 ccw(c138.624,161.483) 140.069,160.037 cw(c138.624,161.483) 138.624,159.438 ; 139.267,159.488 ccw(c138.599,160.156) 139.543,160.198 cw(c138.599,160.156) 139.267,159.488 ; C33.1@139.466,159.687 cw(c139.893,159.26) 139.893,159.864 ccw(c139.893,159.26) C33.1@139.466,159.687
  Top Layer w1: 1.422,152.146 C44.1@4.738,152.146 ; 1.422,154.61 1.522,154.51 C24.2@4.802,154.51 ; 1.422,158.293 1.522,158.193 U5.1@4.636,158.193 ; D8.2@14.45,129.54 15.621,128.369 15.621,115.621 v4(15.113,115.113) ; 21.463,61.468 31.852,61.468 36.728,66.345 v1(45.263,66.345) ; C15.2@26.734,176.287 30.729,176.287 30.798,176.356 ; v1@30.798,171.196 30.798,176.356 ; D4.1@33.147,186.012 33.147,184.404 35.433,182.118 38.989,182.118 40.056,181.051 40.056,177.521 38.949,176.414 C18.2@37.656,176.414 C19.2@34.735,176.414 30.856,176.414 30.798,176.356 ; J4.1@57.932,140.362 cw(c57.079,139.509) 58.286,139.509 cw(c59.493,139.509) J4.1@58.64,140.362 ; J4.1@58.286,140.716 58.286,138.818 59.08,138.024 59.375,138.024 63.094,138.024 J1.2@65.786,140.716 68.897,137.605 C7.2@85.574,137.605 ; C10.1@71.526,158.763 v1(71.526,160.401) ; v1(74.651,150.444) 75.782,150.444 C9.2@75.858,150.368 ; D10.1@75.354,56.896 75.608,56.642 v1(77.724,56.642) 77.724,53.467 80.01,51.181 80.01,39.439 J9.1@78.163,37.592 ; J9.1@78.163,38.092 ccw(c78.163,39.299) 79.016,38.446 ccw(c79.87,37.592) J9.1@78.663,37.592 ; C3.2@100.926,154.94 104.75,158.764 v1(104.75,186.614) ; C46.2@110.776,199.644 110.776,197.555 111.709,196.621 111.709,184.252 113.917,182.044 Y1.2@116.015,182.044 116.029,182.058 118.936,182.058 U4.1@122.336,182.058 U4.1@122.322,182.044 ; J10.2@128.912,91.745 138.845,101.678 P5.26@140.018,101.678 ; J10.2@128.912,92.245 ccw(c128.912,93.452) 129.766,92.598 ccw(c130.619,91.745) J10.2@129.412,91.745 ; P6.1@128.969,99.251 135.051,99.251 P5.25@137.478,101.678 P5.26@140.018,101.678 ; D3.1@131.282,165.1 131.917,164.465 v1(133.121,164.465) ; R62.1@136.841,166.091 136.841,164.806 136.093,164.059 133.528,164.059 v1(133.121,164.465) ; C38.2@146.812,130.166 148.819,128.159 148.819,123.292 ; D4.1@32.846,185.362 cw(c32.121,184.636) 33.147,184.636 ; D4.1@32.846,185.362 cw(c32.121,184.636) 33.147,184.636 ; D4.1@32.846,185.362 cw(c32.121,184.636) 33.147,184.636 ; D4.1@32.846,185.362 cw(c32.121,184.636) 33.147,184.636 ; 33.147,184.636 cw(c34.173,184.636) D4.1@33.448,185.362 ; 33.147,184.636 cw(c34.173,184.636) D4.1@33.448,185.362 ; 33.147,184.636 cw(c34.173,184.636) D4.1@33.448,185.362 ; 33.147,184.636 cw(c34.173,184.636) D4.1@33.448,185.362 ; 129.935,99.251 cw(c129.935,100.217) 129.252,99.534 ccw(c129.935,100.217) 129.935,99.251 ; 129.935,99.251 ccw(c129.935,98.285) 129.252,98.968 cw(c129.935,98.285) 129.935,99.251 ; v1(133.121,164.465) cw(c133.121,165.774) 131.892,165.324 ccw(c133.121,165.774) v1(133.121,164.465) ; P5.26@140.018,101.678 P5.24@140.018,104.218 141.632,104.218 146.812,109.398 C39.2@146.812,122.444 147.971,122.444 148.819,123.292 ; 148.819,123.292 cw(c147.143,124.967) 146.835,122.618 ccw(c147.143,124.967) 148.819,123.292 ; v4@15.018,115.208 ccw(c13.561,116.665) 15.621,116.665 cw(c13.561,116.665) v4@15.018,115.208 ; D4.1@32.572,185.662 ccw(c34.221,185.662) 33.055,184.496 cw(c34.221,185.662) D4.1@32.572,185.662 ; D4.1@33.572,185.662 ccw(c37.635,185.662) 34.762,182.789 cw(c37.635,185.662) D4.1@33.572,185.662 ; C18.2@37.906,176.564 ccw(c37.906,179.445) 39.943,177.408 cw(c37.906,179.445) C18.2@37.906,176.564 ; D10.1@76.004,57.197 ccw(c77.343,58.535) 77.343,56.642 cw(c77.343,58.535) D10.1@76.004,57.197 ; 117.453,182.058 cw(c117.453,180.252) 118.73,181.529 ccw(c117.453,180.252) 117.453,182.058 ; C16.2@119.142,181.529 cw(c120.42,180.252) 120.42,182.058 ccw(c120.42,180.252) C16.2@119.142,181.529 ; v1@133.051,164.394 ccw(c133.861,165.205) 133.861,164.059 cw(c133.861,165.205) v1@133.051,164.394 ; 135.956,98.789 ccw(c133.068,101.678) 137.153,101.678 cw(c133.068,101.678) 135.956,98.789 ; 137.461,100.294 cw(c140.018,97.737) 140.018,101.353 ccw(c140.018,97.737) 137.461,100.294 ; 137.664,100.496 ccw(c136.482,101.678) 138.153,101.678 cw(c136.482,101.678) 137.664,100.496 ; 138.259,101.092 cw(c139.28,100.071) 139.882,101.383 ccw(c139.28,100.071) 138.259,101.092 ; 139.168,102.001 cw(c140.018,101.151) 140.018,102.353 ccw(c140.018,101.151) 139.168,102.001
  Top Layer w2: 1.422,163.233 cw(c4.781,163.233) J11.2@2.406,165.608 cw(c4.781,167.983) 1.422,167.983 ; 1.422,171.45 1.422,171.221 ; D5.1@1.524,176.741 1.524,171.272 1.448,171.196 ; C42.2@11.684,113.344 1.422,123.606 1.422,129.54 1.422,152.146 1.422,154.61 1.422,158.293 1.422,165.608 1.422,171.221 ; U3.0@20.955,177.652 v1@20.955,171.196 ; v1(29.185,171.196) v1@22.708,171.196 ; v1(30.607,171.196) 30.607,162.281 50.927,141.961 v1(50.927,140.589) ; pad.0@36.373,207.391 13.564,207.391 -2.464,191.364 -2.464,175.108 1.422,171.221 ; 1.422,171.221 1.448,171.196 ; 1.448,171.196 8.128,171.196 v1@15.545,171.196 ; v1@15.545,171.196 cw(c15.545,168.129) 17.802,170.205 ccw(c15.545,168.129) v1@15.545,171.196 ; v1@15.545,171.196 v1@17.335,171.196 ; v1@17.336,171.196 cw(c17.336,168.129) 19.593,170.205 ccw(c17.336,168.129) v1@17.336,171.196 ; v1@17.335,171.196 ccw(c17.335,168.243) 15.12,170.196 cw(c17.335,168.243) v1@17.335,171.196 ; v1@17.335,171.196 v1@19.126,171.196 ; v1@19.126,171.196 ccw(c19.126,168.243) 16.911,170.196 cw(c19.126,168.243) v1@19.126,171.196 ; v1@19.126,171.196 cw(c19.126,168.129) 21.384,170.205 ccw(c19.126,168.129) v1@19.126,171.196 ; v1@19.126,171.196 v1@20.917,171.196 ; v1@20.917,171.196 ccw(c20.917,168.243) 18.702,170.196 cw(c20.917,168.243) v1@20.917,171.196 ; v1@20.917,171.196 v1@20.955,171.196 ; v1@20.955,171.196 cw(c20.955,168.214) 23.181,170.198 ccw(c20.955,168.214) v1@20.955,171.196 ; v1@20.955,171.196 v1@22.708,171.196 ; v1@22.707,171.196 ccw(c22.707,168.243) 20.492,170.196 cw(c22.707,168.243) v1@22.707,171.196 ; 32.751,207.391 cw(c32.751,203.77) 35.312,206.33 ccw(c32.751,203.77) 32.751,207.391 ; 32.751,207.391 ccw(c32.751,211.012) 35.312,208.452 cw(c32.751,211.012) 32.751,207.391 ; 1.422,127.972 cw(c3.715,127.972) 2.094,129.593 ccw(c3.715,127.972) 1.422,127.972 ; 1.422,131.108 ccw(c3.715,131.108) 2.094,129.487 cw(c3.715,131.108) 1.422,131.108 ; 13.646,171.196 cw(c13.646,167.875) 15.994,170.223 ccw(c13.646,167.875) 13.646,171.196 ; 22.309,170.223 cw(c24.657,167.875) 24.657,171.196 ccw(c24.657,167.875) 22.309,170.223
  Bottom Layer w0.5: v1(94.21,141.199) v1(99.746,141.199) ; v1(135.38,159.438) 138.811,156.007 v1(141.91,156.007)
  Bottom Layer w0.6: v1(133.297,158.168) 134.11,158.168 v1(135.38,159.438) ; v1(148.107,76.53) 154.28,76.53
  Bottom Layer w1: v1(45.263,66.345) 54.966,56.642 v1(55.88,56.642) v1(77.724,56.642) v1(103.632,56.642) 116.586,56.642 118.618,58.674 140.843,58.674 v1(143.256,61.087) 146.126,63.957 154.28,63.957 ; v1(71.526,160.401) 71.628,160.299 73.584,160.299 ; v1(74.651,150.444) 73.584,151.511 73.584,160.299 ; v1(86.194,160.299) 73.584,160.299 ; D14.2@126.147,132.906 126.147,144.348 135.38,153.581 ; D32.1@130.964,173.99 130.964,181.893 131.115,182.044 ; P5.26@140.018,101.678 154.205,101.678 154.28,101.752 ; 130.964,175.197 cw(c129.757,175.197) 130.61,174.344 ccw(c129.757,175.197) 130.964,175.197 ; 130.964,175.197 ccw(c132.171,175.197) 131.318,174.344 cw(c132.171,175.197) 130.964,175.197
  Bottom Layer w1.5: D12.1@113.563,173.228 113.563,181.917 ; 119.609,182.044 119.609,177.419 117.196,175.006 117.196,167.792 119.126,165.862 131.724,165.862 v1(133.121,164.465) 135.38,162.207 v1(135.38,159.438) 135.38,153.581
  Bottom Layer w2: v1(29.185,171.196) v1(30.607,171.196) 31.267,171.196 ; v1(50.927,140.589) 51.054,140.716 v1(58.293,140.716) ; v1(71.526,160.401) 60.731,171.196 31.267,171.196 ; 113.563,181.917 113.436,182.044 ; 122.91,182.044 119.609,182.044 Y1.2@116.015,182.044 113.436,182.044 ; 31.267,171.196 46.711,186.639 91.999,186.639 104.75,186.639 106.832,186.639 111.428,182.044 113.436,182.044
  Bottom Layer w2.5: 122.91,182.044 131.115,182.044 148.613,182.044 154.28,176.378 154.28,101.752 154.28,76.53 154.28,63.957
  other v1: 15.57,168.148 17.361,168.148 19.152,168.148 20.942,168.148 22.733,168.148 15.57,169.799 17.361,169.799 19.152,169.799 20.942,169.799 22.733,169.799 15.545,171.348 17.335,171.348 19.126,171.348 20.917,171.348 22.708,171.348
  other v4: 14.199,111.15 17.856,111.15 21.514,111.15 25.171,111.15 31.648,113.208 18.776,115.113 22.438,115.113 26.101,115.113 33.426,115.113
  other v5: 93.548,175.92 79.045,179.451 136.677,194.513 125.527,197.815 144.602,200.101 107.747,206.248 125.273,208.077
GND-A12V: C23.1 C25.1 C26.2 C30.2 C31.1 C32.1 D7.1 D9.2 J11.1 R29.1 R33.2 U5.4 Y3.2 Y4.2 | length 156.1
  Top Layer w1: C25.1@11.836,154.51 12.256,154.93 12.256,155.346 ; C32.1@21.706,142.477 C32.1@21.766,142.418 ; 12.256,155.346 cw(c11.645,155.346) 11.798,154.755 ccw(c11.645,155.346) 12.256,155.346
  Top Layer w1.2: Y3.2@12.243,142.24 12.243,140.919 15.037,138.125 24.689,138.125 26.568,140.005 35.219,140.005 R29.1@35.231,140.017 ; C23.1@14.261,148.92 14.261,146.285 D7.1@14.75,145.796 18.669,145.796 18.796,145.923 ; C26.2@19.646,155.194 C26.2@19.772,155.194 ; C32.1@21.766,142.418 21.766,144.72 R33.2@21.706,144.78 19.939,144.78 18.796,145.923 ; C30.2@27.76,151.003 23.569,155.194 C26.2@19.772,155.194 ; C31.1@35.345,151.257 35.345,152.488 26.035,161.798 D9.2@21.354,161.798 19.772,160.216 Y4.2@19.772,158.242 C26.2@19.772,155.194 ; 18.796,145.923 18.796,150.241 19.772,151.217 C26.2@19.772,155.194 ; Y3.2@12.405,142.24 ccw(c15.985,142.24) 13.453,139.709 cw(c15.985,142.24) Y3.2@12.405,142.24 ; 14.261,146.976 ccw(c15.63,146.976) 14.662,146.008 cw(c15.63,146.976) 14.261,146.976 ; 20.33,160.774 ccw(c19.305,161.798) 20.754,161.798 cw(c19.305,161.798) 20.33,160.774 ; 34.46,153.373 cw(c32.444,151.357) 35.295,151.357 ccw(c32.444,151.357) 34.46,153.373
  Top Layer w1.5: J11.1@4.706,165.608 4.706,163.29 6.883,161.112 11.659,161.112 12.256,160.515 U5.4@12.256,158.193 12.256,155.346 ; 12.256,155.346 cw(c11.149,155.346) 11.904,154.537 ccw(c11.149,155.346) 12.256,155.346 ; C25.1@11.907,154.539 ccw(c11.063,155.383) 12.256,155.383 cw(c11.063,155.383) C25.1@11.907,154.539
  Bottom Layer w1.8: Y3.2@12.256,142.24 U5.4@12.256,158.193 12.256,160.757 18.898,160.757 19.772,159.882 Y4.2@19.772,158.242 ; 18.848,160.806 cw(c16.283,158.242) 19.91,158.242 ccw(c16.283,158.242) 18.848,160.806
L1-IN: F1.1 P8.1 RV1.1 W1.5
  other v1: 8.151,29.659 10.046,31.599 6.287,31.625 8.177,33.418
  other v2: 15.558,6.86 13.958,8.46 17.158,8.46 15.558,10.06 15.558,17.02 13.958,18.62 17.158,18.62 15.558,20.22
L1-OUT: P8.2 W1.4
  other v1: 26.002,32.23 24.118,34.114 27.877,34.165 25.951,35.989
  other v2: 25.718,6.86 24.118,8.46 27.318,8.46 25.718,10.06 25.718,17.02 24.118,18.62 27.318,18.62 25.718,20.22
L2-IN: P11.1 RV2.1 W2.5
  other v1: 91.971,29.659 93.866,31.599 90.107,31.625 91.997,33.418
  other v2: 101.569,6.86 99.969,8.46 103.169,8.46 101.569,10.06 101.569,17.02 99.969,18.62 103.169,18.62 101.569,20.22
L2-OUT: P11.2 W2.4
  other v1: 109.822,32.23 107.938,34.114 111.697,34.165 109.771,35.989
  other v2: 111.729,6.86 110.129,8.46 113.329,8.46 111.729,10.06 111.729,17.02 110.129,18.62 113.329,18.62 111.729,20.22
L3-IN: P12.1 RV3.1 W3.5
  other v1: 131.087,29.659 132.982,31.599 129.223,31.625 131.113,33.418
  other v2: 131.509,6.86 129.909,8.46 133.109,8.46 131.509,10.06 131.509,17.02 129.909,18.62 133.109,18.62 131.509,20.22
L3-OUT: P12.2 W3.4
  other v1: 148.938,32.23 147.054,34.114 150.813,34.165 148.887,35.989
  other v2: 141.669,6.86 140.069,8.46 143.269,8.46 141.669,10.06 141.669,17.02 140.069,18.62 143.269,18.62 141.669,20.22
N-IN: C14.1 P9.1 R64.2 RV1.2 RV2.2 RV3.2 RV4.2 T4.3 W4.5 | length 256.5
  Bottom Layer w2: RV4.2@6.543,75.318 11.176,70.685 11.176,65.144 17.152,65.144 C14.1@17.272,65.024 21.718,69.47 T4.3@22.972,69.47 22.972,63.058 29.845,56.185 29.845,43.561 41.832,31.574 42.101,31.574 W4.5@44.016,31.574 ; 21.343,69.095 cw(c22.972,67.467) T4.3@22.972,69.77 ; 21.343,69.095 cw(c22.972,67.467) T4.3@22.972,69.77 ; 21.343,69.095 cw(c22.972,67.467) T4.3@22.972,69.77 ; 21.343,69.095 cw(c22.972,67.467) T4.3@22.972,69.77 ; R64.2@11.176,63.62 cw(c14.855,59.941) 14.855,65.144 ccw(c14.855,59.941) R64.2@11.176,63.62 ; 37.727,35.679 ccw(c44.016,41.968) 44.016,33.074 cw(c44.016,41.968) 37.727,35.679 ; 41.141,32.265 ccw(c44.016,35.139) 44.016,31.074 cw(c44.016,35.139) 41.141,32.265
  Bottom Layer w3: RV1.2@5.992,4.756 5.992,2.898 10.414,-1.524 41.402,-1.524 ; P9.1@41.688,8.46 v2(41.688,6.86) 41.688,-1.238 41.402,-1.524 ; RV2.2@91.844,4.756 91.844,-1.42 91.948,-1.524 ; RV3.2@121.816,4.756 121.816,-0.104 120.396,-1.524 91.948,-1.524 ; 41.402,-1.524 91.948,-1.524 ; RV1.2@5.642,4.756 ccw(c9.283,4.756) 6.708,2.182 cw(c9.283,4.756) RV1.2@5.642,4.756
  other v1: 43.965,29.659 45.86,31.599 42.101,31.625 43.991,33.418
  other v2: 40.088,8.46 43.288,8.46 41.688,10.06 41.688,17.02 40.088,18.62 43.288,18.62 41.688,20.22
N-OUT: P9.2 W4.4
  other v1: 61.816,32.23 59.932,34.114 63.691,34.165 61.765,35.989
  other v2: 51.848,6.86 50.248,8.46 53.448,8.46 51.848,10.06 51.848,17.02 50.248,18.62 53.448,18.62 51.848,20.22
NetC10_2: C10.2 U2.6 X1.1 | length 56
  Top Layer w0.254: C10.2@69.826,158.763 69.826,155.449 X1.1@68.822,154.445 70.944,152.323 78.723,152.323 80.264,150.782 U2.6@84.634,150.782 ; 69.826,157.401 cw(c71.089,157.401) 70.196,158.293 ccw(c71.089,157.401) 69.826,157.401 ; 69.826,157.401 ccw(c68.563,157.401) 69.456,158.293 cw(c68.563,157.401) 69.826,157.401 ; X1.1@69.826,155.348 ccw(c71.475,155.348) 70.309,154.182 cw(c71.475,155.348) X1.1@69.826,155.348 ; 69.826,155.961 ccw(c72.088,155.961) 70.489,154.362 cw(c72.088,155.961) 69.826,155.961 ; 69.826,156.574 ccw(c72.701,156.574) 70.668,154.541 cw(c72.701,156.574) 69.826,156.574 ; 69.826,157.188 ccw(c73.315,157.188) 70.848,154.721 cw(c73.315,157.188) 69.826,157.188 ; 69.826,157.801 ccw(c73.928,157.801) 71.027,154.901 cw(c73.928,157.801) 69.826,157.801 ; C10.2@69.826,158.414 ccw(c74.541,158.414) 71.207,155.08 cw(c74.541,158.414) C10.2@69.826,158.414
NetC11_2: C11.2 U2.5 X1.2 | length 16.4
  Top Layer w0.254: C11.2@77.114,158.763 77.114,155.703 X1.2@78.372,154.445 81.535,151.282 U2.5@84.634,151.282 ; 77.114,157.401 cw(c78.377,157.401) 77.484,158.293 ccw(c78.377,157.401) 77.114,157.401 ; 77.114,157.401 ccw(c75.851,157.401) 76.744,158.293 cw(c75.851,157.401) 77.114,157.401
NetC12_1: C12.1 U3.8
NetC12_2: C12.2 D5.2 L1.1 U3.1 | length 20.7
  Top Layer w1: D5.2@1.524,180.891 3.947,183.314 C12.2@18.264,183.314 ; D5.2@1.524,181.666 ccw(c1.524,183.537) 2.847,182.214 cw(c1.524,183.537) D5.2@1.524,181.666
NetC13_1: C13.1 C20.1 U3.3 | length 19.8
  Top Layer w0.6: C13.1@6.287,177.687 C20.1@8.446,177.687 8.485,177.726 U3.3@18.065,177.726 ; 7.232,177.687 cw(c7.232,178.532) 6.634,177.935 ccw(c7.232,178.532) 7.232,177.687 ; 7.232,177.687 ccw(c7.232,176.842) 6.634,177.44 cw(c7.232,176.842) 7.232,177.687 ; 7.501,177.687 cw(c7.501,176.842) 8.099,177.44 ccw(c7.501,176.842) 7.501,177.687 ; 7.501,177.687 ccw(c7.501,178.532) 8.099,177.935 cw(c7.501,178.532) 7.501,177.687 ; C20.1@8.793,177.44 cw(c9.485,176.748) 9.485,177.726 ccw(c9.485,176.748) C20.1@8.793,177.44 ; C20.1@8.793,177.935 ccw(c9.297,178.438) 9.297,177.726 cw(c9.297,178.438) C20.1@8.793,177.935
NetC13_2: C13.2 R13.2 | length 6.5
  Top Layer w0.6: C13.2@6.287,175.987 6.287,174.032 R13.2@6.403,173.916 ; 6.287,175.142 cw(c7.132,175.142) 6.534,175.74 ccw(c7.132,175.142) 6.287,175.142 ; 6.287,175.142 ccw(c5.442,175.142) 6.04,175.74 cw(c5.442,175.142) 6.287,175.142 ; 6.287,175.02 ccw(c7.407,175.02) 6.615,174.228 cw(c7.407,175.02) 6.287,175.02
NetC14_2: C14.2 N1.2 R64.1 T4.1 | length 29.2
  Bottom Layer w1.5: C14.2@17.272,80.224 20.026,77.47 T4.1@22.972,77.47
  Bottom Layer w2: N1.2@0.727,75.267 0.727,78.197 3.658,81.128 8.668,81.128 R64.1@11.176,78.62 15.668,78.62 C14.2@17.272,80.224
NetC16_1: C16.1 U4.3 Y1.3 | length 9.7
  Top Layer w1: Y1.3@116.015,179.544 118.101,177.458 119.075,177.458 ; C16.1@118.936,179.935 118.936,177.597 119.075,177.458 ; U4.3@122.336,177.458 119.075,177.458
NetC17_1: C17.1 J3.1 U4.2 U4.4 | length 35.5
  Top Layer w0.8: U4.2@122.336,179.758 U4.4@128.236,179.758 129.03,180.552 129.03,185.346 C17.1@125.212,185.346 ; 125.943,179.758 cw(c125.943,177.465) 127.564,179.086 ccw(c125.943,177.465) 125.943,179.758 ; 125.943,179.758 ccw(c125.943,182.052) 127.564,180.43 cw(c125.943,182.052) 125.943,179.758 ; U4.4@127.564,180.73 ccw(c124.026,184.268) 129.03,184.268 cw(c124.026,184.268) U4.4@127.564,180.73 ; U4.4@128.13,180.164 ccw(c125.958,182.336) 129.03,182.336 cw(c125.958,182.336) U4.4@128.13,180.164
NetC18_1: C18.1 C19.1 J2.1 L1.2 R9.1 | length 31.6
  Top Layer w0.6: v4(12.268,174.244) R9.1@13.451,174.244 ; v4@12.727,174.244 cw(c12.727,173.52) 13.239,174.032 ccw(c12.727,173.52) v4@12.727,174.244 ; v4@12.727,174.244 ccw(c12.727,174.968) 13.239,174.456 cw(c12.727,174.968) v4@12.727,174.244 ; R9.1@13.077,174.244 cw(c13.077,175.053) 12.505,174.481 ccw(c13.077,175.053) R9.1@13.077,174.244 ; R9.1@13.077,174.244 ccw(c13.077,173.435) 12.505,174.007 cw(c13.077,173.435) R9.1@13.077,174.244
  Bottom Layer w1: v4(12.268,174.244) 31.115,174.244 32.893,176.022 v4(32.893,180.213)
NetC23_2: C23.2 D7.2 R14.2 Y3.1 | length 16
  Top Layer w1.2: Y3.1@9.743,142.24 9.743,144.889 D7.2@10.65,145.796 10.34,146.106 R14.2@10.34,148.92 C23.2@12.561,148.92 ; 9.743,143.606 cw(c12.54,143.606) 10.562,145.584 ccw(c12.54,143.606) 9.743,143.606 ; 9.743,144.704 cw(c10.553,144.704) 10.405,145.501 ccw(c10.553,144.704) 9.743,144.704
NetC25_2: C25.2 R16.1 U5.3 | length 20.9
  Top Layer w1.2: R16.1@9.218,152.146 9.218,153.592 C25.2@10.136,154.51 ; C25.2@10.136,154.51 ccw(c12.231,152.414) 9.268,152.396 cw(c12.231,152.414) C25.2@10.136,154.51 ; R16.1@9.218,152.073 cw(c12.473,152.073) 10.171,154.375 ccw(c12.473,152.073) R16.1@9.218,152.073 ; 9.218,153.18 cw(c10.433,153.18) 10.148,154.361 ccw(c10.433,153.18) 9.218,153.18
  Top Layer w1.5: C25.2@9.716,154.93 U5.3@9.716,158.193 ; 9.716,155.383 ccw(c10.909,155.383) 10.065,154.539 cw(c10.909,155.383) 9.716,155.383
NetC26_1: C26.1 D9.1 R16.2 Y4.3 | length 29.4
  Top Layer w1: R16.2@12.118,152.146 14.898,152.146 C26.1@17.946,155.194 C26.1@17.579,155.194 ; R16.2@12.118,152.4 14.785,152.4 17.272,154.887 17.272,155.194 Y4.3@17.272,158.242 ; D9.1@17.254,161.798 D9.1@17.272,161.78 ; 16.894,154.508 cw(c17.946,153.456) 17.946,154.944 ccw(c17.946,153.456) 16.894,154.508 ; 17.039,154.653 cw(c17.772,153.92) 17.924,154.946 ccw(c17.772,153.92) 17.039,154.653 ; 17.272,154.869 ccw(c17.521,154.869) 17.345,154.693 cw(c17.521,154.869) 17.272,154.869 ; 17.272,157.283 ccw(c19.935,157.283) 18.052,155.4 cw(c19.935,157.283) 17.272,157.283
  Top Layer w1.8: D9.1@17.254,161.798 17.254,158.26 Y4.3@17.272,158.242
NetC34_1: C34.1 T4.4 U11.1 | length 39.7
  Bottom Layer w1: 26.492,73.533 26.492,81.991
  Bottom Layer w1.5: 26.492,73.533 26.492,72.95 T4.4@29.972,69.47 32.092,71.59 C34.1@34.29,71.59
  Bottom Layer w2: 26.492,81.991 26.492,96.19 29.108,98.806 U11.1@31.75,98.806
NetC35_1: C35.1 C36.1 U8.1 Y8.3 | length 21.3
  Top Layer w1: U8.1@96.368,97.669 96.598,97.899 C35.1@96.598,109.169 96.672,109.243 96.672,111.481 Y8.3@96.672,114.275 ; U8.1@96.297,97.739 ccw(c95.569,98.467) 96.598,98.467 cw(c95.569,98.467) U8.1@96.297,97.739 ; C36.1@96.4,111.275 cw(c95.743,110.618) 96.672,110.618 ccw(c95.743,110.618) C36.1@96.4,111.275 ; C36.1@96.4,111.687 ccw(c95.743,112.344) 96.672,112.344 cw(c95.743,112.344) C36.1@96.4,111.687
NetC42_1: C42.1 L2.1 U11.3 | length 43.2
  Bottom Layer w3: U11.3@11.43,91.186 5.436,97.18 5.436,114.596 C42.1@11.684,120.844 16.526,120.844 L2.1@19.126,123.444
NetC45_2: C45.2 T4.2 U11.2 | length 25.4
  Bottom Layer w1: 31.75,92.519 cw(c32.957,92.519) 32.104,93.372 ccw(c32.957,92.519) 31.75,92.519 ; 31.75,92.519 ccw(c30.543,92.519) 31.396,93.372 cw(c30.543,92.519) 31.75,92.519
  Bottom Layer w1.5: T4.2@29.972,77.47 T4.2@30.058,77.47
  Bottom Layer w2: T4.2@30.058,77.47 C45.2@34.29,77.47 31.75,80.01 U11.2@31.75,93.726